# Altium PCB Ethernet v2.PcbDoc
Units mil, origin at the board's own origin, x right, y up, seen from the top; angles counter-clockwise.
Board outline not stored, 4 copper layers (Top Layer, Internal Plane 2, Internal Plane 1, Bottom Layer); 32 components, 0 nets, 103 pads, 31 vias.
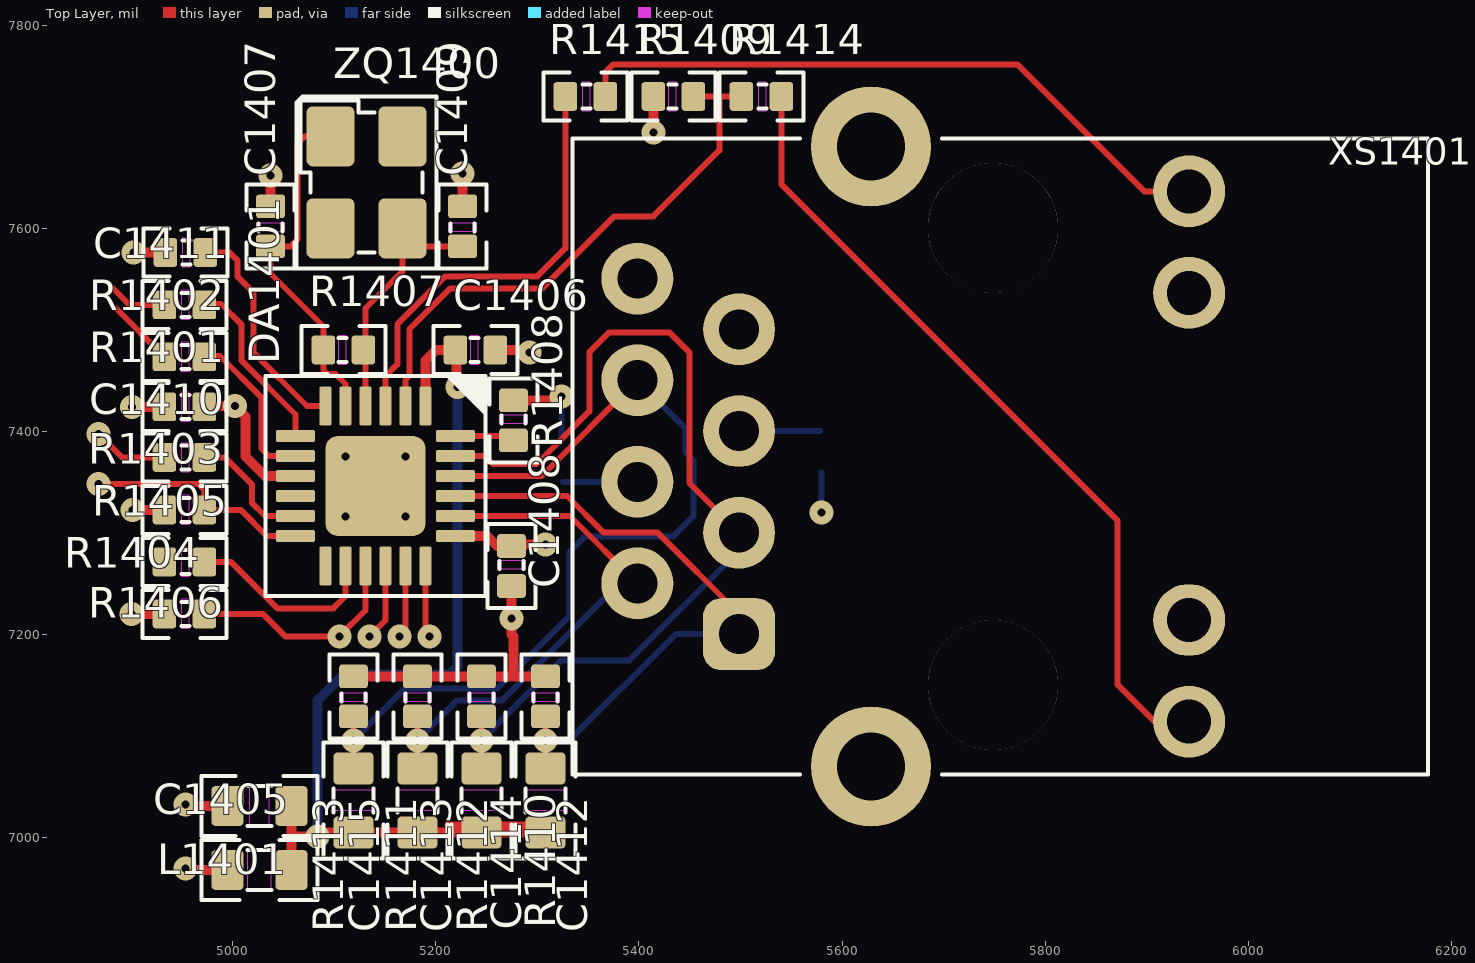
[diagram p0: Top Layer view]
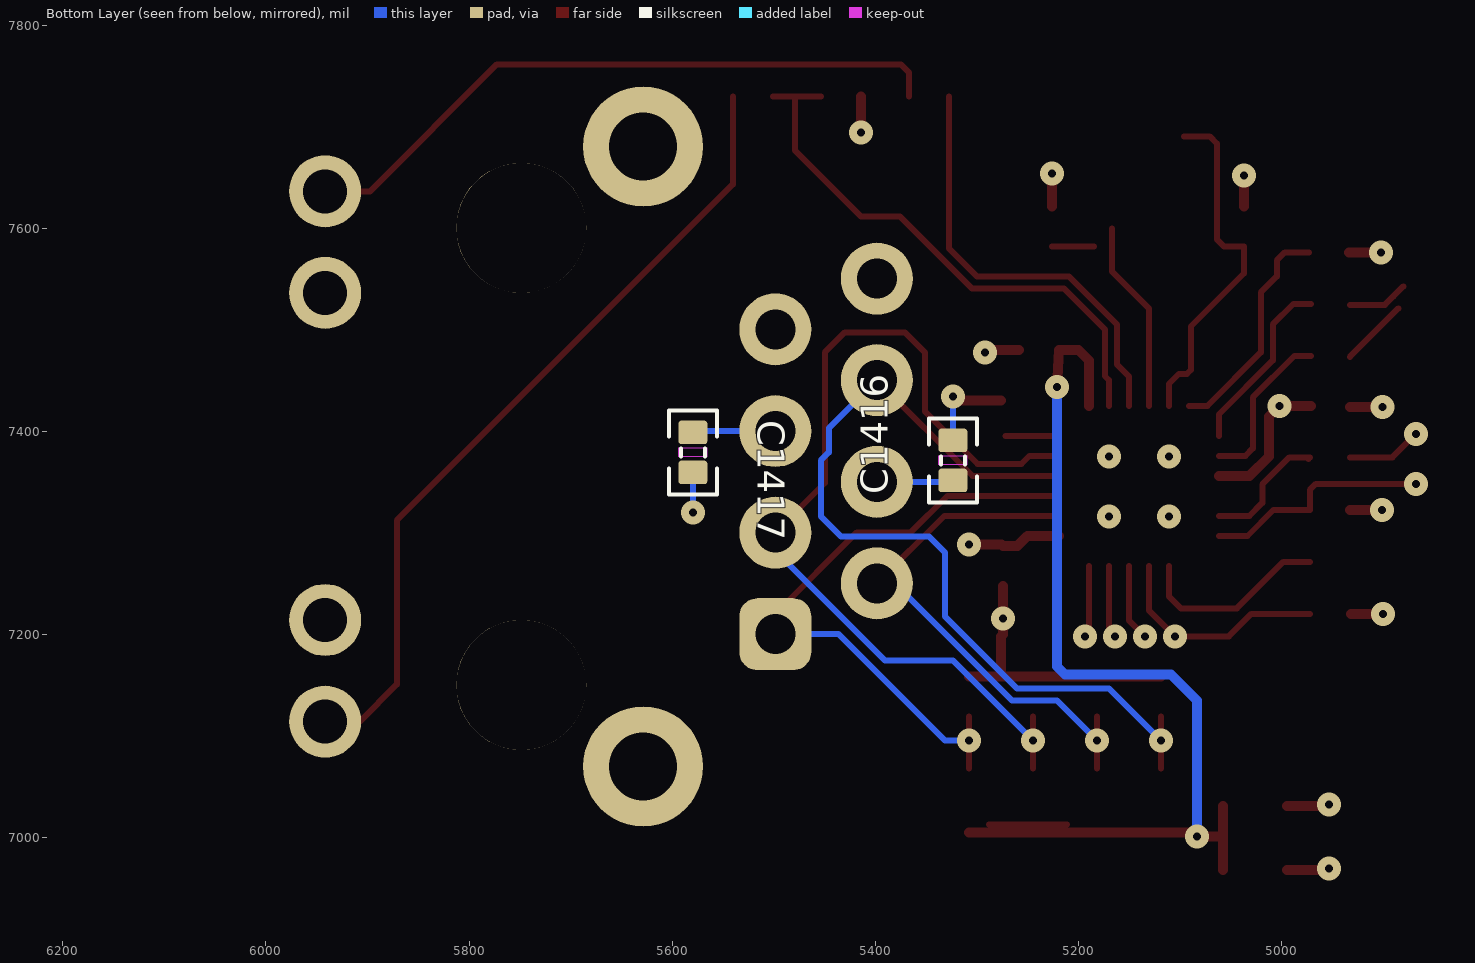
[diagram p1: Bottom Layer view, seen from below]
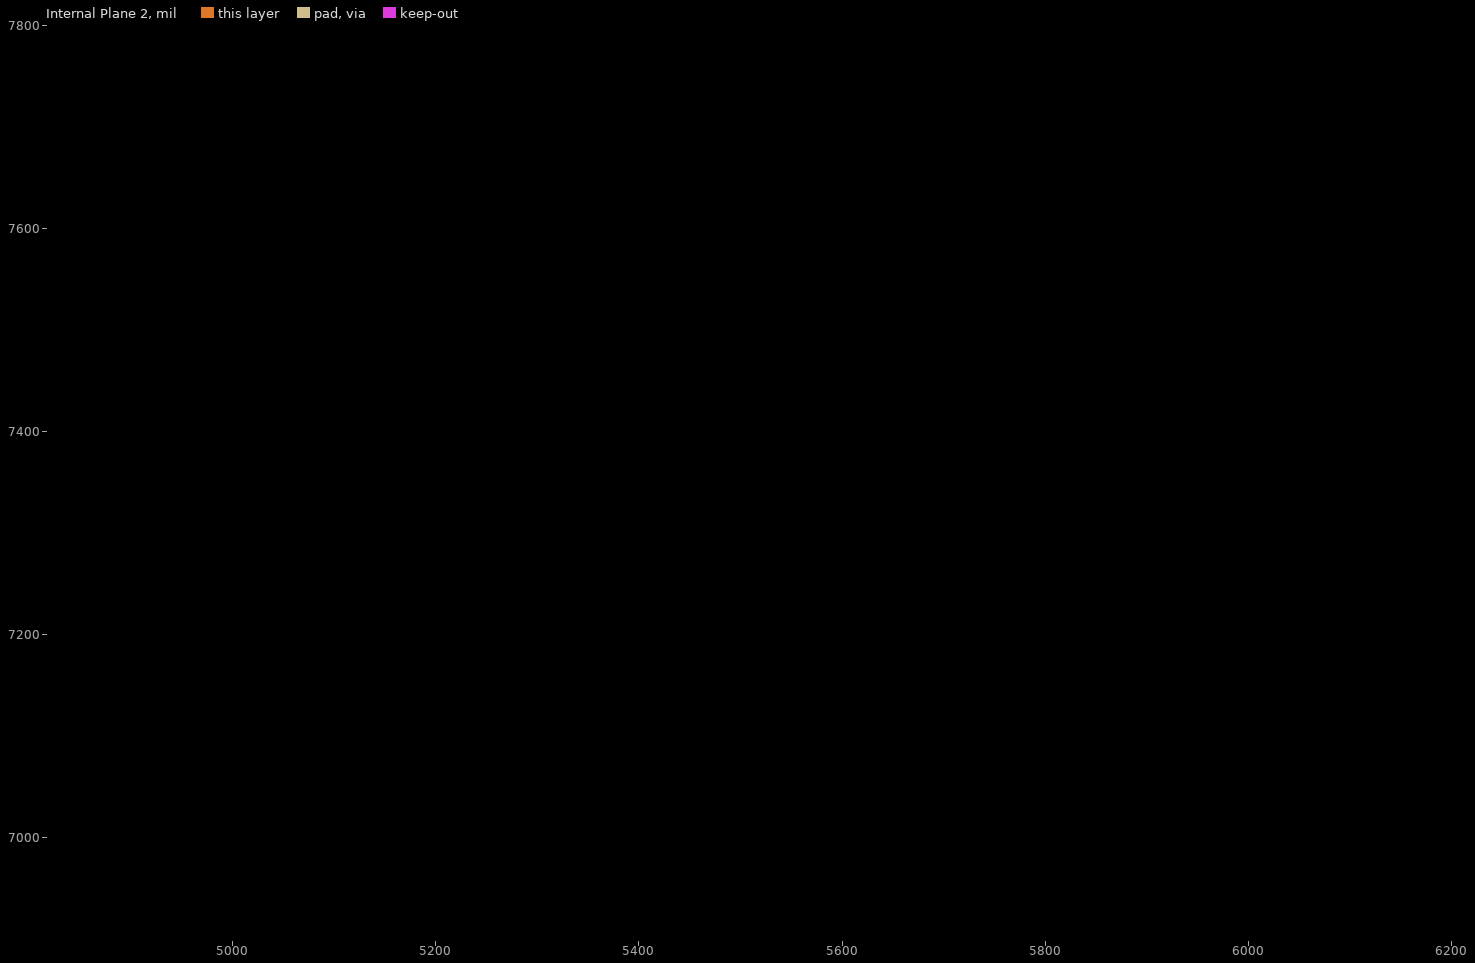
[diagram p2: Internal Plane 2, clearances drawn from the general rule]
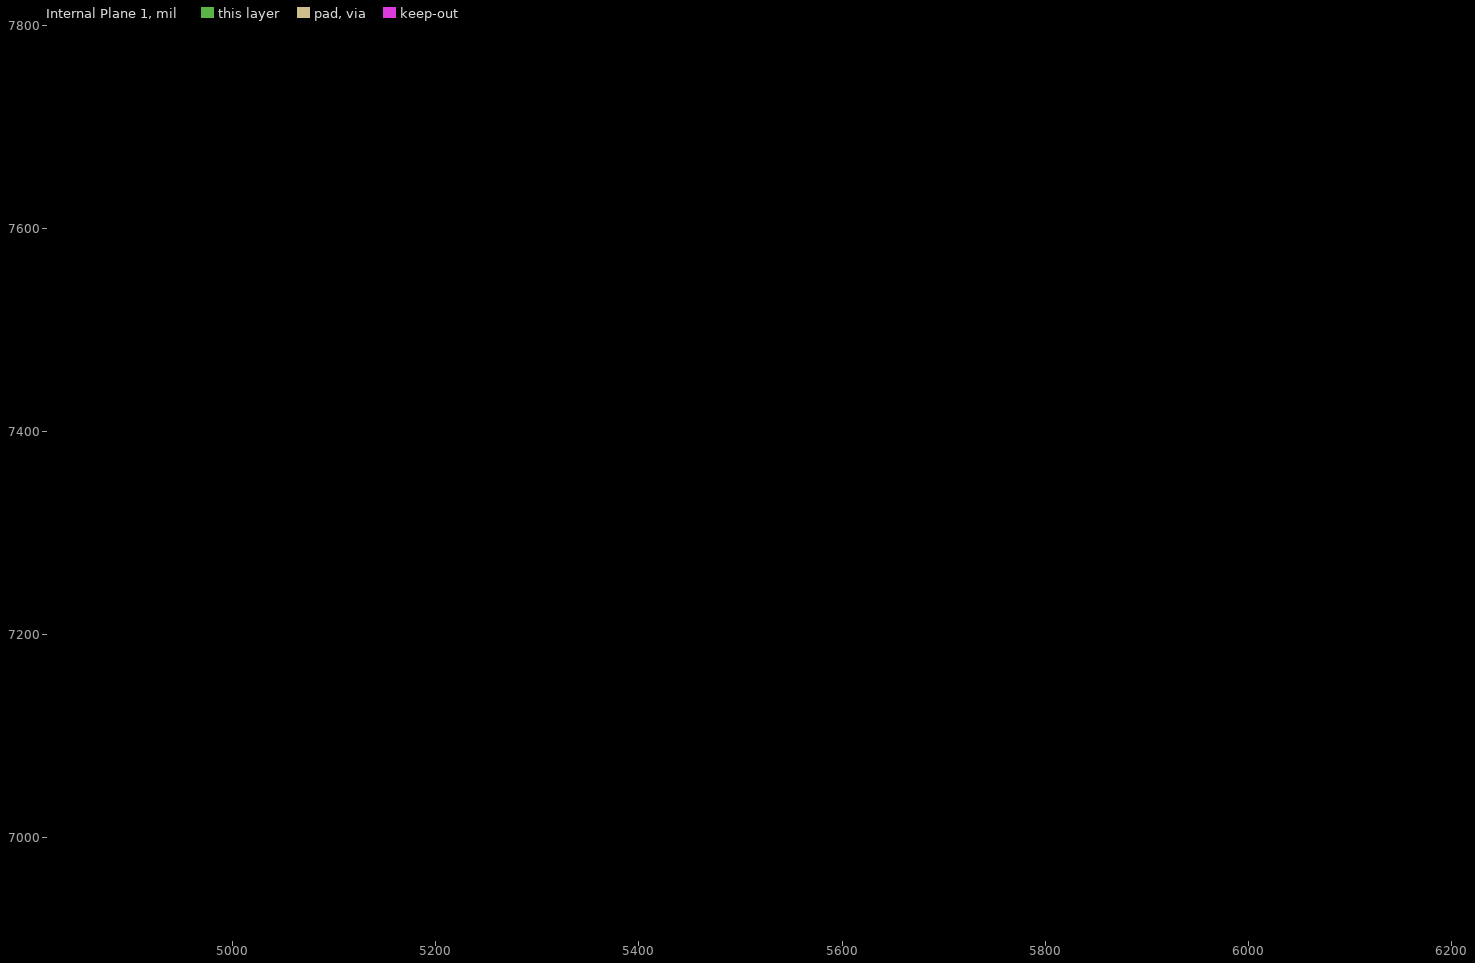
[diagram p3: Internal Plane 1, clearances drawn from the general rule]

## Layer stack, top to bottom
Top Solder: solder mask 0.4, Solder Resist, Dk 3.5
Top Layer: signal copper 1.4
Dielectric 1: dielectric 12.6, FR-4, Dk 4.8
Internal Plane 2: plane copper 1.4
Dielectric2: dielectric 12.6, FR-4, Dk 4.8
Internal Plane 1: plane copper 1.4
Dielectric3: dielectric 12.6, FR-4, Dk 4.8
Bottom Layer: signal copper 1.4
Bottom Solder: solder mask 0.4, Solder Resist, Dk 3.5

## Design rules (kind name [scope] priority, off if disabled: settings)
RoomDefinition Ethernet [InComponentClass('Ethernet')] p1: confinementstyle=ConfineIn formatcopy=TRUE lockcomponents=FALSE outline 4859.25,6942.38 6158.46,6942.38 6158.46,7769.15 4859.25,7769.15

## Components (designator, comment, footprint, x,y, rotation, side; value= is the part's Value field where it differs from the comment)
C1405 "10,0" CAP0603 5058.08,7031.41 r180 top
C1406 "0,1" CAP0402#1 5219.5,7480.23 r0 top
C1407 "18" CAP0402#1 5037.47,7582.23 r90 top
C1408 "0,1" CAP0402#1 5274.61,7287.32 r270 top
C1409 "18" CAP0402#1 5226.45,7582.23 r90 top
C1410 "0,1" CAP0402#1 4972.44,7424.27 r180 top
C1411 "0,1" CAP0402#1 4973.43,7576.24 r180 top
C1412 "18" CAP0402#1 5308.07,7119.54 r90 top
C1413 "18" CAP0402#1 5182.09,7119.54 r90 top
C1414 "18" CAP0402#1 5245.08,7119.54 r90 top
C1415 "18" CAP0402#1 5119.09,7119.54 r90 top
C1416 "0,1" CAP0402#2 5323.82,7371.51 r90 bottom
C1417 "0,1" CAP0402#2 5579.72,7379.39 r270 bottom
DA1401 "LAN8720A" LAN8720 5140.76,7346.37 r270 top
L1401 "BLM18PG471" FB0603 5058.08,6968.42 r180 top
R1401 "22" RES0402 4972.44,7473.48 r180 top
R1402 "22" RES0402 4972.44,7524.66 r180 top
R1403 "22" RES0402 4972.44,7374.47 r180 top
R1404 "220" RES0402 4972.44,7271.65 r180 top
R1405 "1,5K" RES0402 4972.44,7322.83 r180 top
R1406 "10K" RES0402 4972.44,7220.47 r180 top
R1407 "1M" RES0402 5089.57,7480.23 r0 top
R1408 "12K" RES0402 5276.57,7430.57 r270 top
R1409 "10K" RES0402 5414.37,7729.78 r0 top
R1410 "49,9" RES0603 5308.07,7068.36 r270 top
R1411 "49,9" RES0603 5182.09,7068.36 r270 top
R1412 "49,9" RES0603 5245.08,7068.36 r270 top
R1413 "49,9" RES0603 5119.09,7068.36 r270 top
R1414 "470" RES0402 5540.35,7729.78 r180 top
R1415 "470" RES0402 5367.13,7729.78 r180 top
XS1401 "Ethernet" HR911105A 5398.62,7375.45 r90 top
ZQ1400 "25MHz" KX-7 5131.96,7645.22 r270 top

## Footprints (in the part's own frame and the unit in brackets; to place one, negate y for a bottom-side part, rotate by r counter-clockwise, add the part's x,y. Pads: shape width x height; smd on the part's side, far side on the other; paste and mask are expansions set on the pad)
CAP0402#1 [mm]
  rrect25% 0.59x0.72 smd: 1(0,0) 2(1,0)
  Top Layer keep-out region: 0.375,0.36 0.375,-0.36 0.575,-0.36 0.575,0.36
  silkscreen extent -0.55,-0.6 1.55,0.6, body extent 0,-0.25 1,0.25, height 0.49
CAP0402#2 [mm]
  rrect25% 0.59x0.72 smd: 1(-0.5,0) 2(0.5,0)
  Top Layer keep-out region: -0.1,0.36 -0.1,-0.36 0.1,-0.36 0.1,0.36
  silkscreen extent -1.05,-0.6 1.05,0.6, body extent -0.5,-0.25 0.5,0.25, height 0.49
CAP0603 [mm]
  rrect25% 0.8x1 smd: 1(0,0) 2(1.6,0)
  Top Layer keep-out region: 0.55,0.5 0.55,-0.5 1.05,-0.5 1.05,0.5
  silkscreen extent -0.65,-0.75 2.25,0.75, body extent 0,-0.4 1.6,0.4, height 0.65
FB0603 [mm]
  rrect25% 0.8x1 smd: 1(0,0) 2(1.6,0)
  Top Layer keep-out region: 0.5,0.5 0.5,-0.5 1.1,-0.5 1.1,0.5
  silkscreen extent -0.65,-0.75 2.25,0.75, body extent 0,-0.4 1.6,0.4, height 0.65
HR911105A [mm]
  round 3 hole 1.7: 0(-7.747,-5.842) 0(7.747,-5.842)
  rrect50% 1.8x1.8 hole 1: 1(-4.445,-2.54)
  round 1.8 hole 1: 2(-3.175,0) 3(-1.905,-2.54) 4(-0.635,0) 5(0.635,-2.54) 6(1.905,0) 7(3.175,-2.54) 8(4.445,0)
  round 1.8 hole 1.1: 9(-6.629,-13.792) 10(-4.089,-13.792) 11(4.089,-13.792) 12(6.629,-13.792)
  round 3.25 hole 3.25 unplated: x(-5.715,-8.89) x(5.715,-8.89)
  silkscreen extent -7.95,-19.76 7.95,1.63, body extent -7.94,-19.77 7.94,1.63, height 13.5
KX-7 [mm]
  rrect25% 1.5x1.2 smd: 1(-1.15,-0.9) 2(1.15,-0.9) 3(1.15,0.9) 4(-1.15,0.9)
  silkscreen extent -2.15,-1.75 2.15,1.75, body extent -1.6,-1.25 1.6,1.25, height 1.21
LAN8720 [mm]
  rrect25% 2.5x2.5 smd: 0(0,0)
  rrect25% 0.97x0.3 smd: 1(-2,1.25) 2(-2,0.75) 3(-2,0.25) 4(-2,-0.25) 5(-2,-0.75) 6(-2,-1.25) 13(2,-1.25) 14(2,-0.75) 15(2,-0.25) 16(2,0.25) 17(2,0.75) 18(2,1.25)
  rrect25% 0.3x0.97 smd: 7(-1.25,-2) 8(-0.75,-2) 9(-0.25,-2) 10(0.25,-2) 11(0.75,-2) 12(1.25,-2) 19(1.25,2) 20(0.75,2) 21(0.25,2) 22(-0.25,2) 23(-0.75,2) 24(-1.25,2)
  silkscreen extent -2.75,-2.75 2.75,2.75, body extent -2.01,-2.01 2.01,2.01, height 1
RES0402 [mm]
  rrect25% 0.59x0.72 smd: 1(0,0) 2(1,0)
  Top Layer keep-out region: 0.375,0.36 0.375,-0.36 0.575,-0.36 0.575,0.36
  silkscreen extent -0.55,-0.6 1.55,0.6, body extent 0,-0.25 1,0.25, height 0.33
RES0603 [mm]
  rrect25% 0.8x1 smd: 1(0,0) 2(1.6,0)
  Top Layer keep-out region: 0.55,0.5 0.55,-0.5 1.05,-0.5 1.05,0.5
  silkscreen extent -0.65,-0.75 2.25,0.75, body extent 0.03,-0.42 1.58,0.43, height 0.51

## Part data
C1405: library part CAP_0603, "Конденсатор чип"
C1406 C1407 C1408 C1409 C1410 C1411 C1412 C1413 C1414 C1415 C1416 C1417: library part CAP_0402, "Конденсатор чип"
DA1401: "Интерфейс Ethernet"
L1401: library part BLM18PG, "Ферритовая бусина"
R1401 R1402 R1403 R1404 R1405 R1406 R1407 R1408 R1409 R1414 R1415: library part RES_0402, "Резистор чип"
R1410 R1411 R1412 R1413: library part RES_0603, "Резистор чип"
XS1401: library part RJ45-HR911105A, "Разъем RJ45 с трансформатором и LED"
ZQ1400: library part KX-7, "Кварц"

## Via types
v1: diameter 23.62, hole 7.87, Top Layer to Bottom Layer, tented both sides, 31 vias

## Nets (pads, with @x,y where several pads share a name; then routed paths per layer and width w, separated by ;. In a path a pad name is that pad's centre, name@x,y a point inside that pad or via, vN(x,y) a via of type N, cw(c..) or ccw(c..) an arc to the next point about the centre after c; other vN are vias at no path point)
pads on no net: C1405.1 C1405.2 C1406.1 C1406.2 C1407.1 C1407.2 C1408.1 C1408.2 C1409.1 C1409.2 C1410.1 C1410.2 C1411.1 C1411.2 C1412.1 C1412.2 C1413.1 C1413.2 C1414.1 C1414.2 C1415.1 C1415.2 C1416.1 C1416.2 C1417.1 C1417.2 DA1401.0 DA1401.1 DA1401.2 DA1401.3 DA1401.4 DA1401.5 DA1401.6 DA1401.7 DA1401.8 DA1401.9 DA1401.10 DA1401.11 DA1401.12 DA1401.13 DA1401.14 DA1401.15 DA1401.16 DA1401.17 DA1401.18 DA1401.19 DA1401.20 DA1401.21 DA1401.22 DA1401.23 DA1401.24 L1401.1 L1401.2 R1401.1 R1401.2 R1402.1 R1402.2 R1403.1 R1403.2 R1404.1 R1404.2 R1405.1 R1405.2 R1406.1 R1406.2 R1407.1 R1407.2 R1408.1 R1408.2 R1409.1 R1409.2 R1410.1 R1410.2 R1411.1 R1411.2 R1412.1 R1412.2 R1413.1 R1413.2 R1414.1 R1414.2 R1415.1 R1415.2 XS1401.0 XS1401.1 XS1401.2 XS1401.3 XS1401.4 XS1401.5 XS1401.6 XS1401.7 XS1401.8 XS1401.9 XS1401.10 XS1401.11 XS1401.12 XS1401.x ZQ1400.1 ZQ1400.2 ZQ1400.3 ZQ1400.4
copper on no net: | length 9983.5
  Top Layer w5.91: v1(4868.11,7348.43) 4966.54,7348.43 4972.44,7342.52 4972.44,7322.83 5008.21,7322.83 5033.89,7297.16 5062.02,7297.16 ; v1(4868.11,7397.64) 4891.28,7374.47 4933.07,7374.47 ; 4880.48,7542.77 4890.32,7532.93 4898.59,7524.66 4933.07,7524.66 ; 4885.43,7521.12 4933.07,7473.48 ; 4971.46,7474.32 4987.77,7474.32 5028.54,7433.55 5028.54,7383.32 5035.97,7375.9 5062.02,7375.9 ; 4971.46,7525.51 4988.72,7525.51 5008.86,7505.37 5008.86,7469.94 5062.02,7416.78 5062.02,7395.58 ; 4972.44,7220.47 5029.98,7220.47 5052.17,7198.28 v1(5105.31,7198.28) 5130.91,7223.88 5130.91,7267.63 ; 4972.44,7271.65 4998.48,7271.65 5044.29,7225.84 5099.41,7225.84 5111.23,7237.66 5111.23,7267.63 ; 4973.43,7576.24 4997.05,7576.24 5004.92,7568.36 5004.92,7552.61 5020.67,7536.87 5020.67,7477.81 5073.37,7425.11 5091.54,7425.11 ; 4973.85,7373.06 4972.44,7374.47 4992.58,7374.47 5019.15,7347.89 5019.15,7329.72 5032.03,7316.84 5062.02,7316.84 ; 5096.53,7690.5 5071.03,7690.5 5064.04,7683.52 5064.04,7589.12 5057.16,7582.23 5037.47,7582.23 5037.47,7555.5 5089.57,7503.39 5089.57,7480.23 5089.57,7460.55 5093.51,7456.61 5101.38,7456.61 5111.23,7446.76 5111.23,7425.11 ; 5119.09,7068.36 v1(5119.09,7095.92) 5119.09,7119.54 ; 5130.91,7425.11 5130.91,7521.13 5167.39,7557.61 5167.39,7599.95 ; v1(5134.84,7198.28) 5150.6,7214.04 5150.6,7267.63 ; 5150.6,7425.11 5150.6,7454.2 5162.4,7466 5162.4,7505.37 5209.65,7552.61 5300.2,7552.61 5327.76,7580.17 5327.76,7729.78 ; v1(5164.37,7198.28) 5164.37,7200.2 5170.28,7206.12 5170.28,7267.63 ; 5170.28,7425.11 5170.28,7450.71 5174.21,7454.64 5174.21,7500.48 5214.54,7540.8 5305.09,7540.8 5375.95,7611.67 5414.37,7611.67 5479.33,7676.63 5479.33,7729.78 ; 5182.09,7068.36 v1(5182.09,7095.92) 5182.09,7119.54 ; 5185.11,7582.23 5226.45,7582.23 ; 5189.97,7267.63 5189.97,7202.21 v1(5193.9,7198.28) ; 5211.61,7013.24 5288.39,7013.24 ; 5219.5,7316.84 5332.23,7316.84 5398.62,7250.45 ; 5219.5,7336.53 5329.25,7336.53 5365.13,7300.65 5418.31,7300.65 5498.62,7220.33 ; 5219.5,7356.21 5304.39,7356.21 5398.62,7450.45 ; 5219.5,7375.9 5248.57,7375.9 5256.44,7368.03 5299.49,7368.03 5351.38,7419.91 5351.38,7477.81 5371.06,7497.5 5430.12,7497.5 5449.8,7477.81 5449.8,7349.27 5498.62,7300.45 ; 5219.5,7395.58 5272.19,7395.58 ; 5245.08,7068.36 v1(5245.08,7095.92) 5245.08,7119.54 ; 5308.07,7068.36 v1(5308.07,7095.92) 5308.07,7119.54 ; 5367.13,7729.78 5367.13,7753.4 5375,7761.28 5772.64,7761.28 5897.46,7636.45 5941.62,7636.45 ; 5453.74,7729.78 5479.33,7729.78 ; 5500.98,7729.78 5479.33,7729.78 ; 5540.35,7729.78 5540.35,7643.17 5871.06,7312.46 5871.06,7151.04 5907.65,7114.45 5941.62,7114.45
  Top Layer w9.84: v1(4900.59,7220.47) 4932.09,7220.47 ; v1(4900.98,7424.27) 4933.07,7424.27 ; v1(4901.57,7322.83) 4933.07,7322.83 ; v1(4902.56,7576.24) 4934.06,7576.24 ; v1(4953.74,6969.94) 4955.26,6968.42 4995.09,6968.42 ; v1(4953.74,7032.93) 4955.26,7031.41 4995.09,7031.41 ; 4971.46,7425.11 v1(5002.5,7425.11) 5012.8,7414.82 5012.8,7375.45 5032.03,7356.21 5062.02,7356.21 ; 5037.47,7621.6 v1(5037.47,7652.1) ; 5058.08,6968.42 5058.08,7031.41 ; 5060.04,7001.43 v1(5083.66,7001.43) ; v1@5091.98,7005.37 5119.09,7005.37 5182.09,7005.37 5245.08,7005.37 5308.07,7005.37 ; 5119.09,7158.91 5182.09,7158.91 5245.08,7158.91 5276.57,7158.91 ; 5189.97,7425.11 5189.97,7469.95 5200.25,7480.23 5219.5,7480.23 v1(5221.46,7443.89) ; 5219.5,7297.16 5250.54,7297.16 5260.38,7287.32 5274.61,7287.32 ; 5226.45,7621.6 v1(5226.45,7653.92) ; 5258.87,7480.23 5289.9,7480.23 v1(5292.32,7477.81) ; 5274.61,7247.95 v1(5274.61,7215.99) 5274.61,7200.24 5276.57,7198.28 5276.57,7158.91 ; 5276.13,7288.84 v1(5308.07,7288.84) ; 5276.57,7430.57 v1@5319.88,7430.57 ; 5308.07,7158.91 5276.57,7158.91 ; v1(5414.37,7694.35) 5414.37,7729.78
  Bottom Layer w5.91: v1(5119.09,7095.92) 5170.28,7147.1 5260.83,7147.1 5331.69,7217.97 5331.69,7280.96 5347.44,7296.71 5434.06,7296.71 5453.74,7316.39 5453.74,7371.51 5445.87,7379.39 5445.87,7403.21 5398.62,7450.45 ; v1(5182.09,7095.92) 5221.46,7135.29 5265.72,7135.29 5380.88,7250.45 5398.62,7250.45 ; v1(5245.08,7095.92) 5323.82,7174.66 5390.75,7174.66 5498.62,7282.54 5498.62,7300.45 ; v1(5308.07,7095.92) 5331.69,7095.92 5436.22,7200.45 5498.62,7200.45 ; 5323.82,7391.2 v1(5323.82,7434.5) ; 5325.2,7350.45 5398.62,7350.45 ; 5498.62,7400.45 5578.35,7400.45 ; v1(5579.72,7320.33) 5579.72,7359.7
  Bottom Layer w9.84: v1(5083.66,7001.43) 5083.66,7135.29 5109.25,7160.88 5213.58,7160.88 5221.46,7168.76 v1(5221.46,7443.89)
  other v1: 5111.22,7316.39 5170.28,7316.39 5111.22,7375.45 5170.28,7375.45

## Other copper
Internal Plane 1 (plane layer: these items are gaps in the copper):
  lines w19.68: 4878.94,6962.06 6138.78,6962.06 6138.78,7749.47 4878.94,7749.47 4878.94,6962.06
Internal Plane 2 (plane layer: these items are gaps in the copper):
  lines w19.68: 4878.94,6962.06 6138.78,6962.06 6138.78,7749.47 4878.94,7749.47 4878.94,6962.06